# Altium PCB Power+ICs.PcbDoc
Units mil, origin at the board's own origin, x right, y up, seen from the top; angles counter-clockwise.
Board outline 2600 x 2600 mil, 2 copper layers (Top Layer, Bottom Layer); 18 components, 22 nets, 104 pads, 0 vias.
Unrouted connection lines stored in the file: 39.
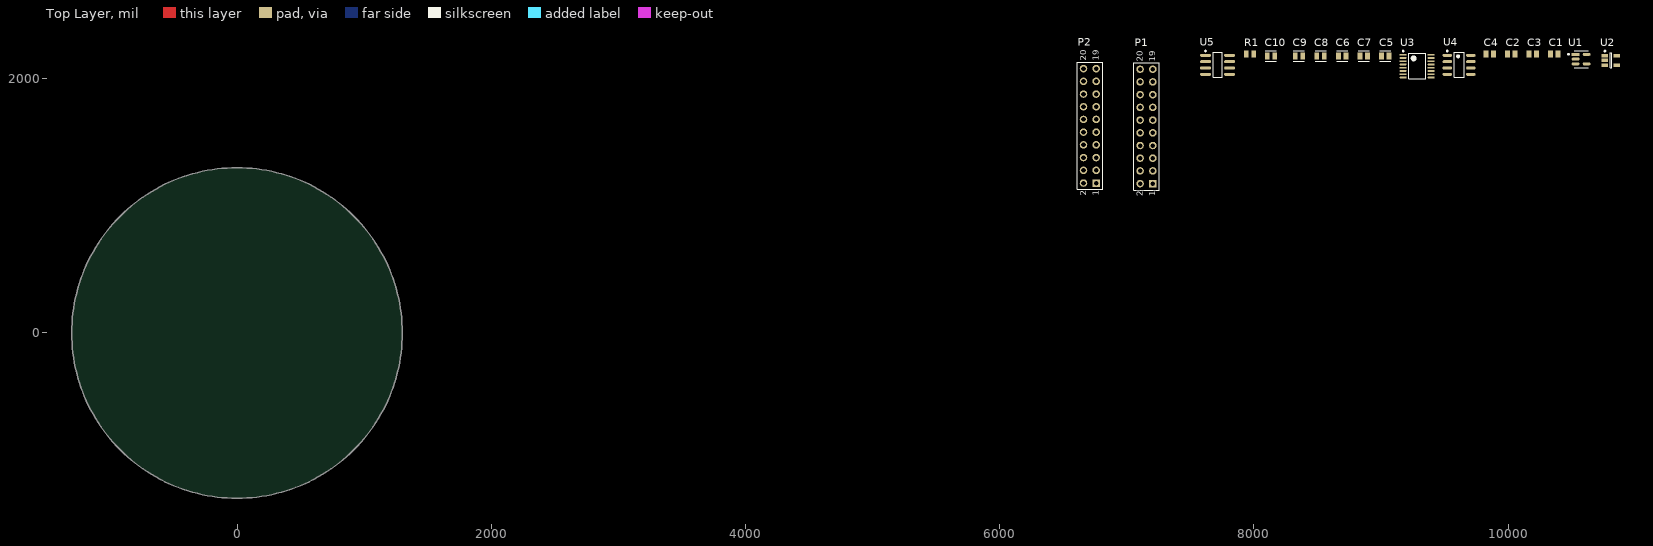
[diagram p0: Top Layer view]
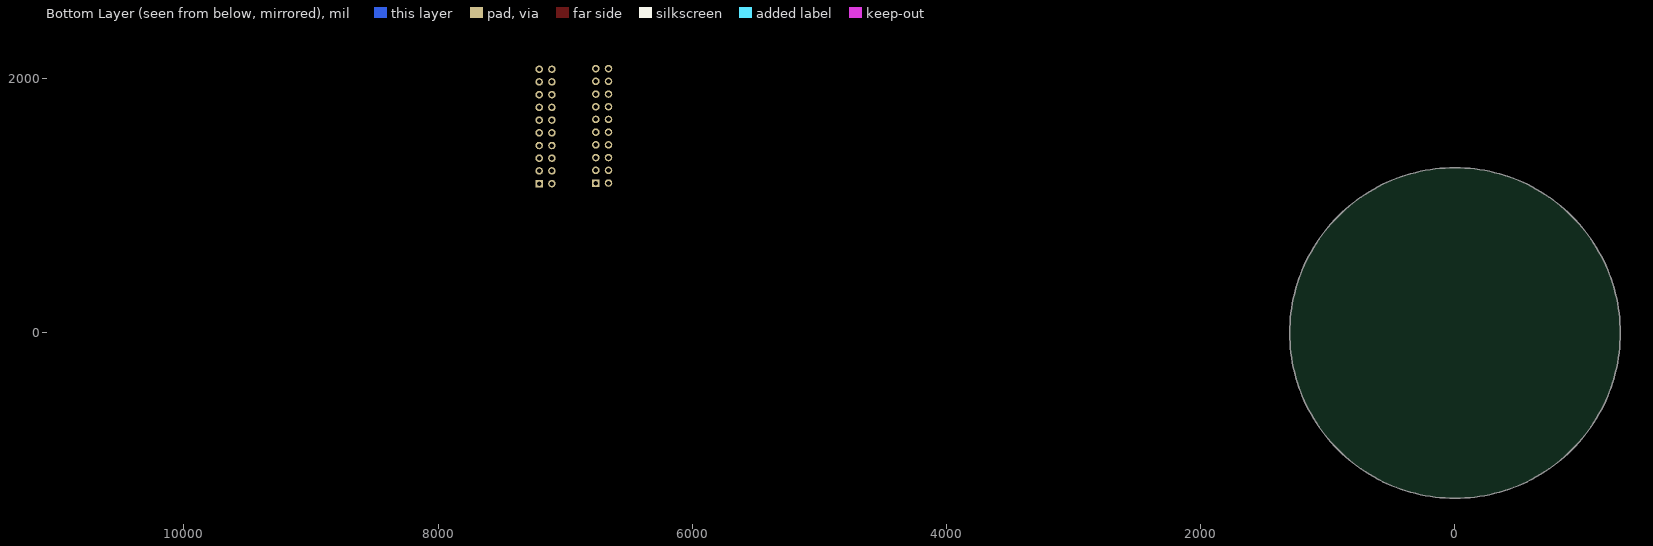
[diagram p1: Bottom Layer view, seen from below]

## Layer stack, top to bottom
Top Solder: solder mask 0.4, Solder Resist, Dk 3.5
Top Layer: signal copper 1.4
Dielectric 1: dielectric 12.6, FR-4, Dk 4.8
Bottom Layer: signal copper 1.4
Bottom Solder: solder mask 0.4, Solder Resist, Dk 3.5

## Board outline
0,-1300 cw(c0,0) -1300,0 cw(c0,0) 0,1300 cw(c0,0) 1300,0 cw(c0,0)

## Design rules (kind name [scope] priority, off if disabled: settings)
Clearance [All] p1: gap=10 ignorepadtopadclearanceinfootprint=FALSE except(0: Arc-Hole Track-Hole SMDPad-Hole THPad-Hole Via-Hole Fill-Hole Poly-Hole Region-Hole Text-Hole)
PolygonConnect [All] p1: connectstyle=Relief reliefconductorwidth=10 reliefentries=4 polygonreliefangle="90 Angle" airgapwidth=10
RoutingVias [All] p1: holewidth=28 width=50 viastyle="Through Hole" minholewidth=28 minwidth=50 maxholewidth=28 maxwidth=50
SolderMaskExpansion [All] p1: expansion=4 istentingtop=FALSE
Width [All] p1: maxlimit=10 minlimit=10 preferedwidth=10
30 further rules are at their usual default settings.

## Components (designator, comment, footprint, x,y, rotation, side; value= is the part's Value field where it differs from the comment)
C1 "1 uF" CAPC2013X135X45LL10T25 10365,2195 r0 top
C2 "1 uF" CAPC2013X135X45LL10T25 10025,2195 r0 top
C3 "1 uF" CAPC2013X135X45LL10T25 10195,2195 r0 top
C4 "1 uF" CAPC2013X135X45LL10T25 9855,2195 r0 top
C5 "100 nF" FP-C0805C-DN-MFG 9035,2180 r0 top value="0.10 μF"
C6 "100 nF" FP-C0805C-DN-MFG 8695,2180 r0 top value="0.10 μF"
C7 "100 nF" FP-C0805C-DN-MFG 8865,2180 r0 top value="0.10 μF"
C8 "100 nF" FP-C0805C-DN-MFG 8525,2180 r0 top value="0.10 μF"
C9 "100 nF" FP-C0805C-DN-MFG 8355,2180 r0 top value="0.10 μF"
C10 "100 nF" FP-C0805C-DN-MFG 8135,2180 r0 top value="0.10 μF"
P1 "Header 10X2" HDR2X10 7205,1175 r90 top
P2 "Header 10X2" HDR2X10 6760,1180 r90 top
R1 "1k" RESC2013X55X40LL15T20 7970,2195 r0 top
U1 "ADP150AUJZ-2.0-R7" FP-UJ-5-IPC_B 10575,2155 r0 top
U2 "LD39015M10R" SOT23-5L_M 10810,2145 r0 top
U3 "AD5328BRUZ" RU-16_L 9285,2100 r0 top
U4 "MCP3201-CI/SN" SOIC-SN8_L 9615,2110 r0 top
U5 "LT1213CS8#TRPBF" LT-S8-8_N 7715,2110 r0 top

## Footprints (in the part's own frame and the unit in brackets; to place one, negate y for a bottom-side part, rotate by r counter-clockwise, add the part's x,y. Pads: shape width x height; smd on the part's side, far side on the other; paste and mask are expansions set on the pad)
CAPC2013X135X45LL10T25 [mm] "Chip Capacitor, 2-Leads, Body 2.00x1.25mm, IPC High Density"
  rect 1x1.3 smd: 1(-0.75,0) 2(0.75,0)
  body extent -1.05,-0.67 1.05,0.68, height 1.35
FP-C0805C-DN-MFG [mm]
  rect 0.95x1.35 smd paste+0 mask+0: 1(-0.75,0) 2(0.75,0)
  silkscreen extent -1.1,-1.07 1.1,1.07, body extent -1.4,-0.85 1.4,0.85, height 0.25
FP-UJ-5-IPC_B [mm]
  rect 1.554x0.572 smd paste+0 mask+0: 1(-1.1,0.95)
  rrect100% 1.554x0.572 smd paste+0 mask+0: 2(-1.1,0) 3(-1.1,-0.95) 4(1.1,-0.95) 5(1.1,0.95)
  silkscreen extent -2.65,-1.7 1.4,1.7, body extent -2.13,-1.7 2.13,1.7, height 0.25
HDR2X10 [mm] "Connector; Header; 10x2 Position"
  rect 1.5x1.5 hole 0.9: 1(0,0)
  round 1.5 hole 0.9: 2(0,2.54) 3(2.54,0) 4(2.54,2.54) 5(5.08,0) 6(5.08,2.54) 7(7.62,0) 8(7.62,2.54) 9(10.16,0) 10(10.16,2.54) 11(12.7,0) 12(12.7,2.54) 13(15.24,0) 14(15.24,2.54) 15(17.78,0) 16(17.78,2.54) 17(20.32,0) 18(20.32,2.54) 19(22.86,0) 20(22.86,2.54)
  silkscreen extent -1.27,-1.27 24.13,3.81
LT-S8-8_N [mm] "SOIC, 8-Leads, Body 4.9x3.9mm, Pitch 1.27mm, IPC Medium Density"
  oval 2.2x0.6 smd: 1(-2.4,1.905) 2(-2.4,0.635) 3(-2.4,-0.635) 4(-2.4,-1.905) 5(2.4,-1.905) 6(2.4,-0.635) 7(2.4,0.635) 8(2.4,1.905)
  silkscreen extent -2.52,-2.5 0.9,2.88, body extent -2,-2.5 2,2.5, height 1.76
RESC2013X55X40LL15T20 [mm] "Chip Resistor, 2-Leads, Body 2.00x1.25mm, IPC High Density"
  rect 0.9x1.3 smd: 1(-0.775,0) 2(0.775,0)
  body extent -1.07,-0.7 1.07,0.7, height 0.55
RU-16_L [mm] "TSOP, 16-Leads, Body 5x4.4mm, Pitch 0.65mm, IPC High Density"
  oval 1.4x0.35 smd: 1(-2.8,2.275) 2(-2.8,1.625) 3(-2.8,0.975) 4(-2.8,0.325) 5(-2.8,-0.325) 6(-2.8,-0.975) 7(-2.8,-1.625) 8(-2.8,-2.275) 9(2.8,-2.275) 10(2.8,-1.625) 11(2.8,-0.975) 12(2.8,-0.325) 13(2.8,0.325) 14(2.8,0.975) 15(2.8,1.625) 16(2.8,2.275)
  silkscreen extent -2.92,-2.55 1.7,3.12, body extent -2.25,-2.55 2.25,2.55, height 1.2
SOIC-SN8_L [mm] "SOIC, 8-Leads, Body 4.9x3.9mm, Pitch 1.27mm, IPC High Density"
  oval 1.9x0.6 smd: 1(-2.35,1.905) 2(-2.35,0.635) 3(-2.35,-0.635) 4(-2.35,-1.905) 5(2.35,-1.905) 6(2.35,-0.635) 7(2.35,0.635) 8(2.35,1.905)
  silkscreen extent -2.47,-2.5 1,2.88, body extent -2,-2.5 2,2.5, height 1.75
SOT23-5L_M [mm] "SOT23, 5-Leads, Body 2.9x1.6mm, Pitch 0.95mm, Lead Span 2.8mm, IPC Low Density"
  rect 1.3x0.7 smd: 1(-1.2,0.95) 2(-1.2,0) 3(-1.2,-0.95) 4(1.2,-0.95) 5(1.2,0.95)
  silkscreen extent -1.32,-1.5 0.15,1.97, body extent -0.87,-1.5 0.87,1.5, height 1.45

## Part data
C1 C2 C3 C4: library part CMP-1036-04761-2, Manufacturer=Murata, Part Number=GRM21BR71H105KA12L
C5 C6 C7 C8 C9 C10: library part CMP-2007-00279-2, "CAP CER 0.1UF 50V X7R 0805", Capacitance="0.10 μF", Manufacturer=KEMET, Manufacturer Part Number=C0805C104K5RACTU, Package=C0805C-DN, Temperature="-55°C to +125°C", Temperature Characteristic=X7R, Temperature Coefficient=30ppm/°C, Temperature Range High=+125°C, Temperature Range Low=-55°C, Tolerance=0.1, Voltage Rating="50 V", Automotive=No, Category=Cap, ComponentLink2Description=Datasheet, ComponentLink2URL=https://content.kemet.com/datasheets/KEM_C1003_C0G_SMD.pdf, Device Class L1="Passive Components", Device Class L2=Capacitors, Device Class L3="Ceramic Capacitors", Digikey Description="CAP CER 0.1UF 50V X7R 0805", Height=0.88mm, Ipc Land Pattern Name=CAPC200125X78, Lead Free=Yes, Material=Ceramic, Mouser Description="Cap Ceramic 0.1uF 50V X7R 10% SMD 2.0 x 1.2 mm 125 C Paper T/R", Octopart=https://octopart.com/c0805c104k5ractu-kemet-143926, RoHS=TRUE
P1 P2: "Header, 10-Pin, Dual row", LatestRevisionDate=17-Jul-2002, LatestRevisionNote="Re-released for DXP Platform.", Publisher="Altium Limited"
R1: library part CMP-2001-04738-1, "TNPW08051K00BEEN", Manufacturer="Vishay Dale", Part Number=TNPW08051K00BEEN
U1: library part CMP-09138-000207-1, "IC REG LINEAR 2V 150MA 5TSOT", Case/Package=SOT-23-5, Dropout Voltage=105mV, Max Input Voltage=5.5V, Max Operating Temperature=125°C, Max Output Current=150mA, Max Supply Current=320uA, Min Current Limit=190mA, Min Input Voltage=2.2V, Min Operating Temperature=-40°C, Min Output Voltage=2V, Operating Supply Current=10uA, Power Supply Rejection Ratio (PSRR)=70dB, Quiescent Current=22uA, Accuracy=1%, Contact Plating=Tin, Lead Free="Contains Lead", Mount="Surface Mount", Number Of Outputs=1, Number of Pins=5, Number of Regulators=1, Output Configuration=Positive, Output Current=150mA, Output Type=Fixed, Output Voltage=2V, Packaging="Cut Tape", Polarity=Positive, RoHS Compliant=Yes, Series=-
U2: library part CMP-0244-00345-1, "150 mA Low Quiescent Current Low Noise Voltage Regulator, 1.0V, 5-Pin SOT-23, Tape and Reel", ComponentLink1Description="Manufacturer URL", ComponentLink1URL=http://www.st.com, ComponentLink2Description=Datasheet, ComponentLink2URL=http://www.st.com/internet/com/TECHNICAL_RESOURCES/TECHNICAL_LITERATURE/DATASHEET/CD00173477.pdf, DatasheetVersion=1/02/2009, PackageDescription="5-Pin SOT-23 Package, 2.9 x 1.6 mm Body, 0.95 mm Pitch, 2.8 mm Lead Span", PackageReference=SOT23-5L, PackageVersion=1/01/2008
U3: library part CMP-0318-02011-2, "Octal 12-Bit Voltage Output Digital-to-Analog Converter, 2.5 to 5.5 V, -40 to +125 degC, RU-16, Pb-Free, Tube", Generic Part Number=AD5328, Manufacturer="Analog Devices", # DAC Outputs=8, Code_JEDEC=MO-153-AB, ComponentLink1Description="Manufacturer URL", ComponentLink1URL=http://www.analog.com/en/index.html, ComponentLink2Description=Datasheet, ComponentLink2URL=http://www.analog.com/static/imported-files/data_sheets/AD5308_5318_5328.pdf, ComponentLink3Description="Package Specification", ComponentLink3URL=http://www.analog.com/static/imported-files/packages/36244347913743854010197452789RU16.pdf, ComponentLink4Description="Product URL", ComponentLink4URL=http://www.analog.com/en/digital-to-analog-converters/da-converters/ad5328/products/product.html, DatasheetVersion=Rev.F, Max V+=5.5V, Mounting Technology="Surface Mount", Op Pwr Diss=5mW, PackageDescription="16-Lead Thin Shrink Small Outline Package [TSSOP]", PackageReference=RU-16, PackageVersion=Nov-2002, Packing=Tube, PartNumber=AD5328BRUZ, Resolution (Bits)=12, RevisionNote="Component URL fixed", RoHS=Y, Settling Time=6Âµs, Single Supply=Yes
U4: library part CMP-0188-00469-2, "2.7V 12-Bit A/D Converter with SPI Serial Interface, 8-Pin SOIC 150mil, C Performance Grade, Industrial Temperature", Code_IPC=SOIC127P600-8, Code_JEDEC=MS-012, ComponentLink1Description="Manufacturer URL", ComponentLink1URL=http://www.microchip.com/, ComponentLink2Description=Datasheet, ComponentLink2URL=http://ww1.microchip.com/downloads/en/DeviceDoc/21290F.pdf, ComponentLink3Description="Package Specification", ComponentLink3URL=http://www.microchip.com/stellent/groups/techpub_sg/documents/packagingspec/en012702.pdf, DatasheetVersion="revF, Aug-2011", PackageDescription="8-Lead Plastic Small Outline (SN) - Narrow, 3.90mm Body [SOIC]", PackageReference=SOIC-SN8, PackageVersion="revBB, Aug-2009", RevisionNote="URLs added. DatasheetVersion updated."
U5: library part CMP-0359-03127-2, "Dual Channel, Precision, Fast Operational Amplifier, 28 MHz Typical GBW, 8.5 V/us Typical SR, 2.5 to 36 V, 8-Pin SOIC (S8-8), Commercial, Pb-Free, Reel", Linear Technology Part Number=LT1213, Manufacturer="Linear Technology", Channels (#)=2, ComponentLink1Description="Manufacturer URL", ComponentLink1URL=http://www.linear.com/, ComponentLink2Description=Datasheet, ComponentLink2URL=http://cds.linear.com/docs/en/datasheet/12134fa.pdf, ComponentLink3Description="Package Specification", ComponentLink3URL=http://cds.linear.com/docs/en/packaging/05081610_G_SO8.pdf, DatasheetVersion="Rev. A", GBW (MHz) Typical=28, Is (mA) Typical=2.7, Mounting Technology="Surface Mount", PackageDescription="8-Pin Plastic Small Outline, Body 4.9 x 3.9 mm, Pitch 1.27 mm", PackageReference=LT-S8-8, PackageVersion="Rev G", Packing=Reel, PartNumber=LT1213CS8#TRPBF, RevisionNote="URLs updated", RoHS=Pb-Free, SR (V/us) Typical=8.5, Type=VFB, Vos (mV) Typical=0.075, Vs Max (V)=36, Vs Min (V)=2.5

## Nets (pads, with @x,y where several pads share a name; then routed paths per layer and width w, separated by ;. In a path a pad name is that pad's centre, name@x,y a point inside that pad or via, vN(x,y) a via of type N, cw(c..) or ccw(c..) an arc to the next point about the centre after c; other vN are vias at no path point)
1V: C3.2 U2.5
1V_REF: U5.3
2V: C1.2 U1.5
2V_REF: C5.1 C6.1 C7.1 U3.8 U3.9 U4.1
3.3V: C8.1 C9.1 C10.2 U3.3 U4.8 U5.8
3V3: C2.2 C4.2 U1.1 U1.3 U2.1 U2.3
!ADC_CS: U4.5
!DAC_CS: U3.2
GND: C1.1 C2.1 C3.1 C4.1 C5.2 C6.2 C7.2 C8.2 C9.2 C10.1 U1.2 U2.2 U3.1 U3.14 U4.3 U4.4 U5.4
IDS: R1.1 U5.2
MISO: U4.6
MOSI: U3.15
SCK: U3.16 U4.7
VDS_BUFF: U5.6 U5.7
VDS_RAW: U3.7 U5.5
VGS1_RAW: U3.4
VGS2_RAW: U3.5
VGS3_RAW: U3.6
VGS4_RAW: U3.10
VGS5_RAW: U3.11
VGS6_RAW: U3.12
VMEAS: R1.2 U4.2 U5.1
pads on no net: P1.1 P1.2 P1.3 P1.4 P1.5 P1.6 P1.7 P1.8 P1.9 P1.10 P1.11 P1.12 P1.13 P1.14 P1.15 P1.16 P1.17 P1.18 P1.19 P1.20 P2.1 P2.2 P2.3 P2.4 P2.5 P2.6 P2.7 P2.8 P2.9 P2.10 P2.11 P2.12 P2.13 P2.14 P2.15 P2.16 P2.17 P2.18 P2.19 P2.20 U1.4 U2.4 U3.13

## Silkscreen, mask and mechanical layers (free items; w line width, h text height)
Mechanical 1:
  circle w5: c0,0 r1300

## Text inside footprints (layer, text, board x,y; h text height)
P1: Top Overlay "20" at 7125,2135 h50 r90; Top Overlay "19" at 7225,2135 h50 r90; Top Overlay "1" at 7225,1075 h50 r90; Top Overlay "2" at 7125,1075 h50 r90
P2: Top Overlay "20" at 6680,2140 h50 r90; Top Overlay "19" at 6780,2140 h50 r90; Top Overlay "1" at 6780,1080 h50 r90; Top Overlay "2" at 6680,1080 h50 r90